# Altium PCB PCB.PcbDoc (part 2 of 2)
Units mil, origin at the board's own origin, x right, y up, seen from the top; angles counter-clockwise.
Board outline 3935 x 3935 mil, 2 copper layers (Top Layer, Bottom Layer); 188 components, 185 nets, 566 pads, 164 vias.
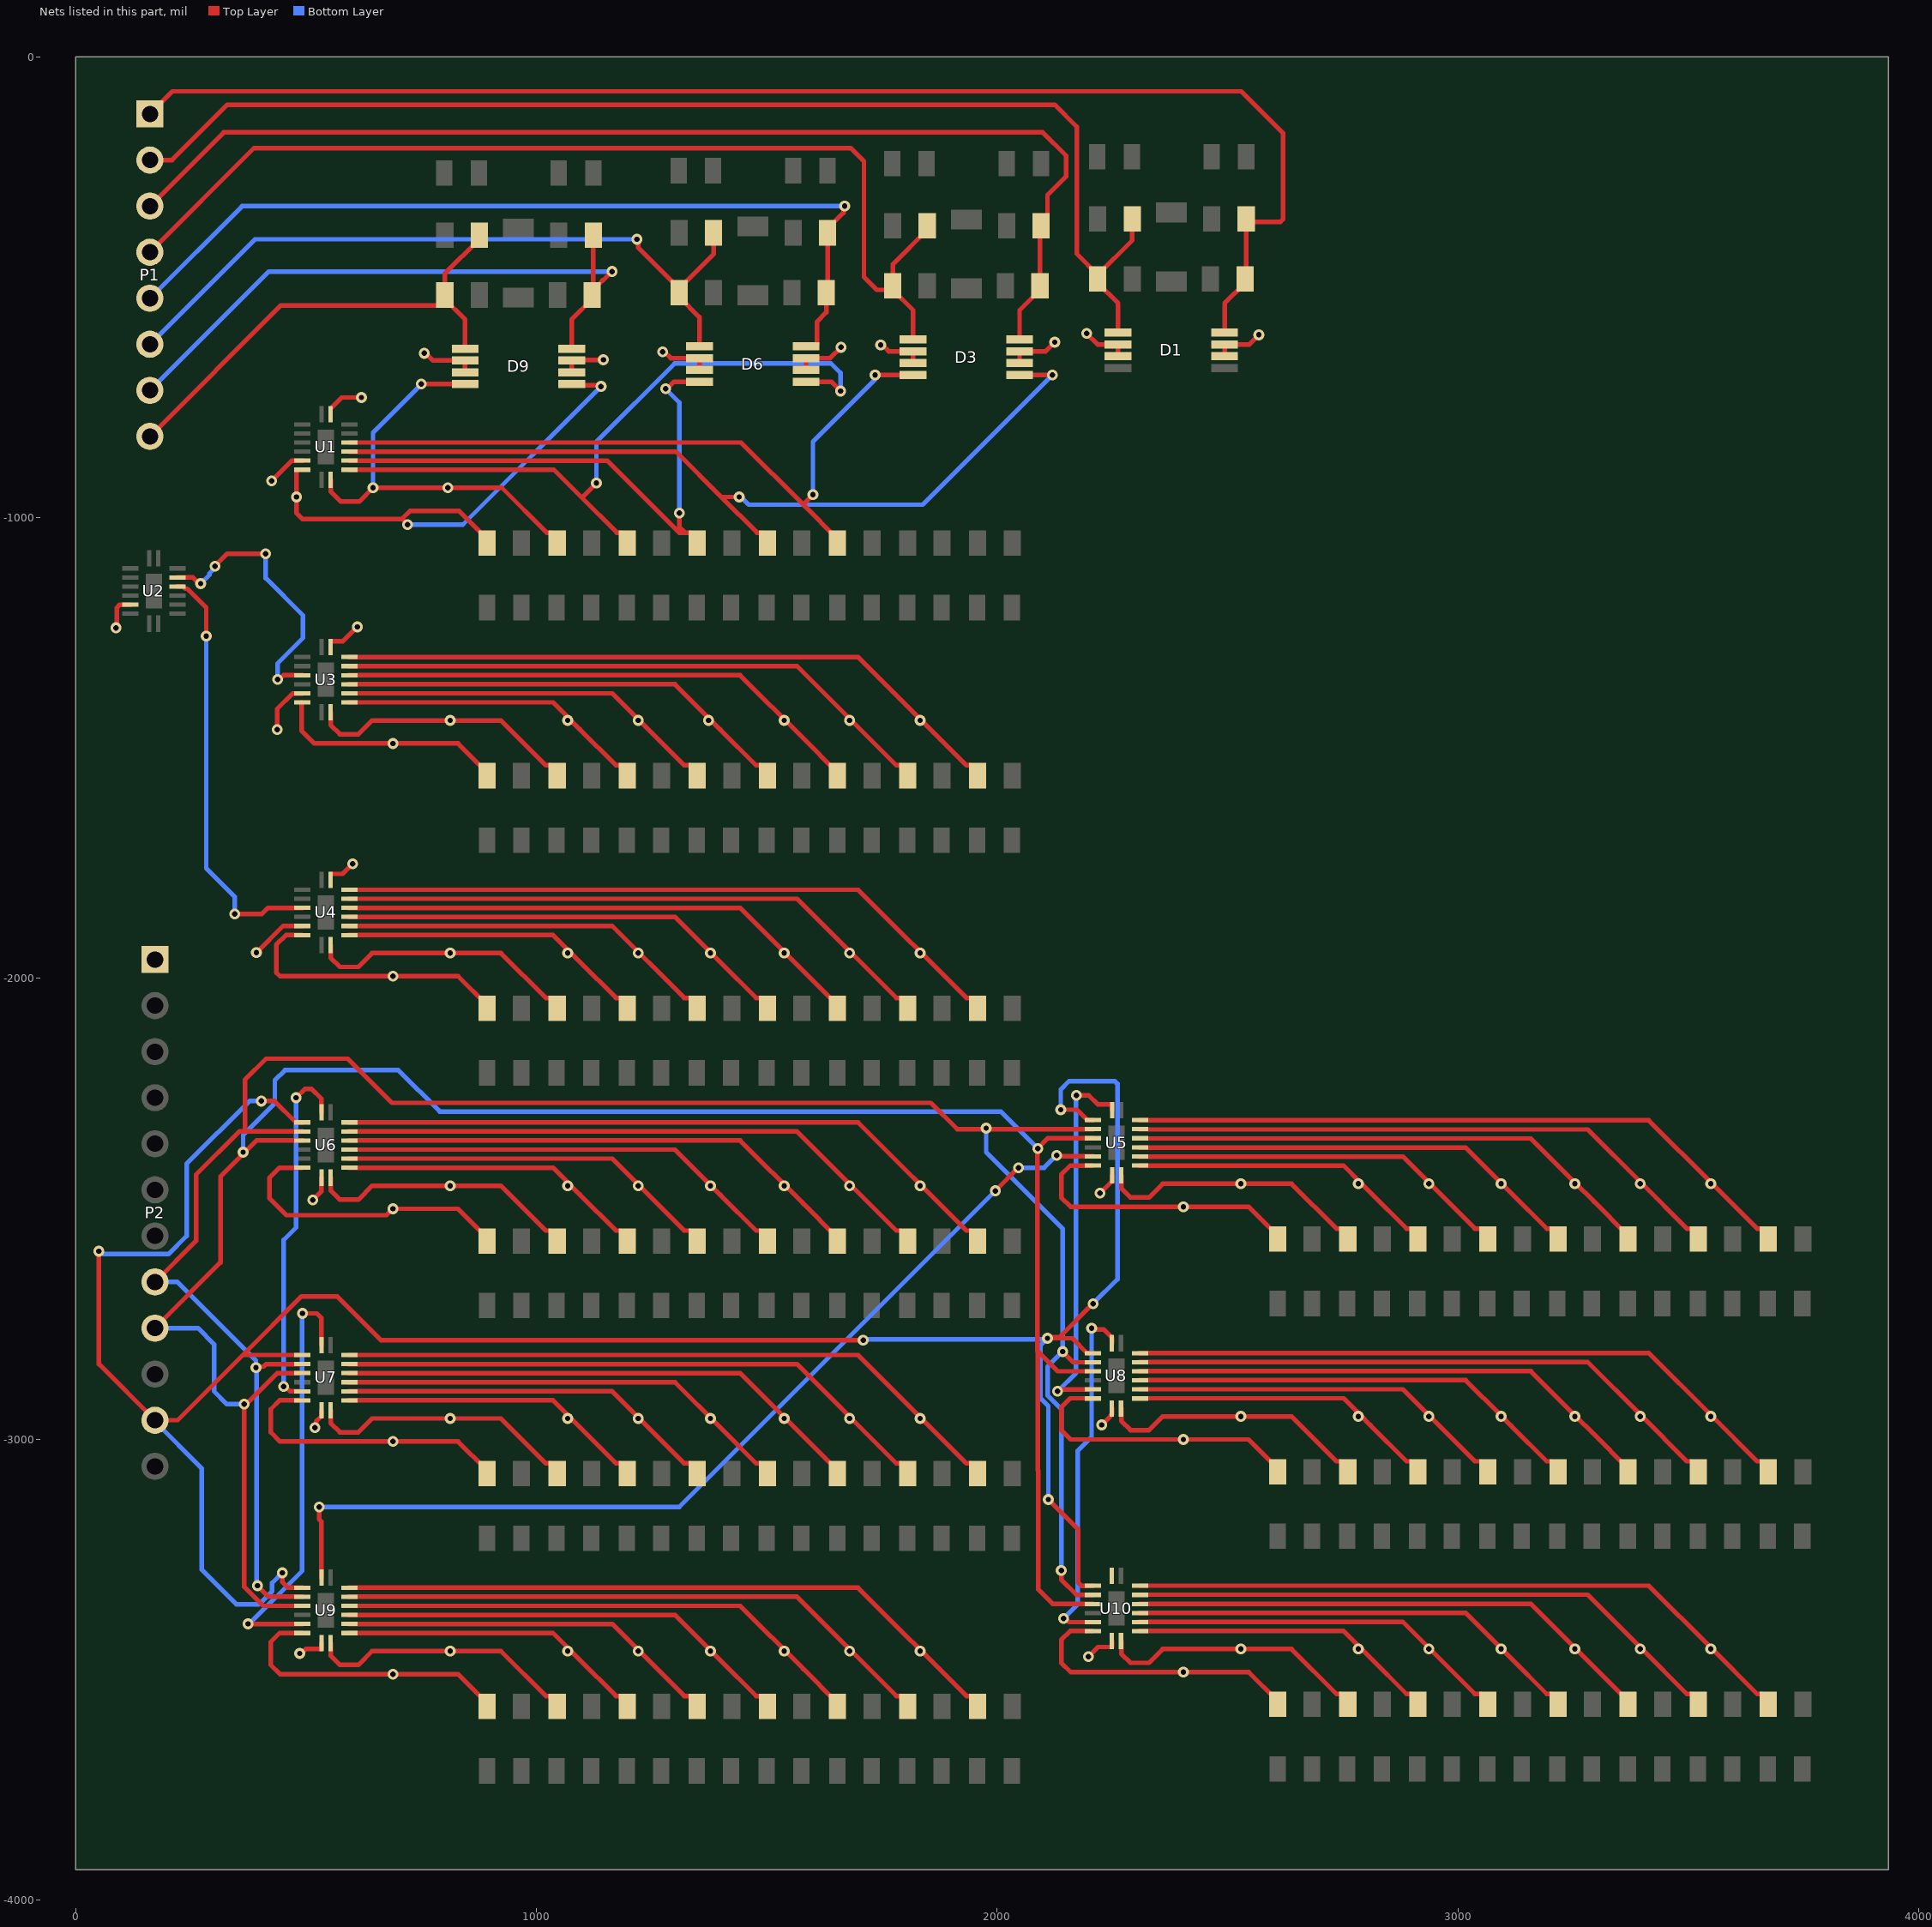
[diagram p2: the nets of this part, all layers, seen from the top]

## Via types
v1: diameter 23.62, hole 11.81, Top Layer to Bottom Layer, 143 vias
v2: diameter 23.62, hole 11.81, Top Layer to Bottom Layer, tented both sides, 21 vias

## Nets (pads, with @x,y where several pads share a name; then routed paths per layer and width w, separated by ;. In a path a pad name is that pad's centre, name@x,y a point inside that pad or via, vN(x,y) a via of type N, cw(c..) or ccw(c..) an arc to the next point about the centre after c; other vN are vias at no path point) (continued)
OUT3: D3.4 R25.2 U1.13 | length 1584.7
  Top Layer w10: U1.13@594.17,-836.77 1443.94,-836.77 1581.09,-973.91 ; v1(1600,-950) 1600,-950.09 1581.09,-969 1581.09,-973.91 ; R25.2@1653.31,-1055 1653.31,-1046.14 1581.09,-973.91 ; v1(1735,-690) D3.4@1817.32,-690
  Bottom Layer w10: v1(1600,-950) 1600,-835 1735,-700 v1(1735,-690)
OUT4: D3.5 R29.2 U1.12 | length 1908.3
  Top Layer w10: U1.12@594.17,-856.46 1302.63,-856.46 1401.17,-955 ; v1(1440,-955) 1401.17,-955 ; R29.2@1501.17,-1055 1501.17,-1046.14 1487.47,-1032.44 1478.61,-1032.44 1401.17,-955 ; D3.5@2048.66,-690 v1(2120,-690)
  Bottom Layer w10: v1(1440,-955) 1443.69,-955 1460.5,-971.81 1838.19,-971.81 v1(2120,-690)
OUT5: D6.4 R33.2 U1.11 | length 1244
  Top Layer w10: U1.11@594.17,-876.14 1153.23,-876.14 1309.53,-1032.44 1322.43,-1032.44 ; v1(1280,-720) 1283.69,-720 1298.69,-705 D6.4@1353.66,-705 ; v1(1310,-990) 1310,-1020.01 1322.43,-1032.44 ; R33.2@1349.03,-1055 1349.03,-1046.14 1335.33,-1032.44 1322.43,-1032.44
  Bottom Layer w10: v1(1280,-720) 1310,-750 v1(1310,-990)
OUT6: D6.5 R37.2 U1.10 | length 1541.4
  Top Layer w10: U1.10@594.17,-895.83 1037.71,-895.83 1095.94,-954.06 ; v1(1130,-925) 1100.94,-954.06 1095.94,-954.06 ; R37.2@1196.88,-1055 1196.88,-1046.14 1183.18,-1032.44 1174.32,-1032.44 1095.94,-954.06 ; D6.5@1585,-705 1640,-705 v1(1660,-725)
  Bottom Layer w10: v1(1130,-925) 1130,-835 1300,-665 1639.14,-665 1660,-685.86 v1(1660,-725)
OUT7: D9.4 R41.2 U1.9 | length 957.3
  Top Layer w10: U1.9@552.83,-917.48 553.11,-917.76 553.11,-943.11 575,-965 615,-965 v1(645,-935) 924.74,-935 1022.18,-1032.44 1031.04,-1032.44 1044.74,-1046.14 R41.2@1044.74,-1055 ; v1(750,-710) D9.4@845,-710
  Bottom Layer w10: v1(645,-935) 645,-815 v1(750,-710)
  other v1: 807.6,-935
OUT8: D9.5 R45.2 U1.7 | length 1181.6
  Top Layer w10: U1.7@479.09,-896.1 479.09,-898.73 479,-898.83 v1(479,-955) 479,-990 491.81,-1002.81 707.81,-1002.81 ; v1(720,-1015) 707.81,-1002.81 ; R45.2@892.6,-1055 892.6,-1046.14 831.46,-985 725.62,-985 707.81,-1002.81 ; D9.5@1076.34,-710 1078.84,-712.5 1137.5,-712.5 v1(1140,-715)
  Bottom Layer w10: v1(720,-1015) 840,-1015 v1(1140,-715)
OUT9: R49.2 U3.15 | length 1475.3
  Top Layer w10: U3.15@592.2,-1302.4 1698.03,-1302.4 1933.07,-1537.44 1941.93,-1537.44 1955.63,-1551.14 R49.2@1955.63,-1560
  other v1: 1832.6,-1440
OUT9-16: U2.14 U3.4 | length 615.1
  Top Layer w10: U2.14@220.35,-1129.59 253.9,-1129.59 267.31,-1143 v2(271,-1143) ; v2(302,-1105) 329,-1078 v2(412,-1078) ; v2(438,-1351) 441.69,-1351 450.91,-1341.77 U3.4@491.81,-1341.77
  Bottom Layer w10: v2(271,-1143) 289.96,-1124.04 289.96,-1120.73 302,-1108.69 v2(302,-1105) ; v2(412,-1078) 412,-1130.99 492.86,-1211.84 492.86,-1261.14 438,-1316 v2(438,-1351)
OUT10: R54.2 U3.14 | length 1323.9
  Top Layer w10: U3.14@592.2,-1322.09 1565.57,-1322.09 1780.93,-1537.44 1789.79,-1537.44 1803.49,-1551.14 1803.49,-1560 R54.2@1803.49,-1568.86
  other v1: 1679.6,-1440
OUT11: R59.2 U3.13 | length 1154.7
  Top Layer w10: U3.13@592.2,-1341.77 1441.97,-1341.77 1579.12,-1478.91 1651.34,-1551.14 R59.2@1651.34,-1560
  other v1: 1537.6,-1440
OUT12: R64.2 U3.12 | length 994.4
  Top Layer w10: U3.12@592.2,-1361.46 1300.66,-1361.46 1399.2,-1460 1476.64,-1537.44 1485.5,-1537.44 1499.2,-1551.14 R64.2@1499.2,-1560
  other v1: 1373.6,-1440
OUT13: R69.2 U3.11 | length 834.1
  Top Layer w10: U3.11@592.2,-1381.14 U3.11@594.17,-1381.14 1164.16,-1381.14 1320.46,-1537.44 1333.36,-1537.44 1347.06,-1551.14 R69.2@1347.06,-1560
  other v1: 1220.6,-1440
OUT14: R74.2 U3.10 | length 673.8
  Top Layer w10: U3.10@592.2,-1400.83 1035.74,-1400.83 1093.97,-1459.06 1172.36,-1537.44 1181.21,-1537.44 1194.92,-1551.14 R74.2@1194.92,-1560
  other v1: 1067.6,-1440
OUT15: R79.2 U3.9 | length 592.9
  Top Layer w10: U3.9@552.83,-1422.48 553.11,-1422.76 553.11,-1450.08 573.03,-1470 613.03,-1470 643.03,-1440 v1(812.6,-1440) 922.77,-1440 1020.21,-1537.44 1029.07,-1537.44 1042.77,-1551.14 R79.2@1042.77,-1560
OUT16: R84.2 U3.7 | length 507.7
  Top Layer w10: U3.7@489.84,-1400.83 489.84,-1462 517.84,-1490 v1(688.03,-1490) 829.49,-1490 890.63,-1551.14 R84.2@890.63,-1560
OUT17: R18.2 U4.15 | length 1475.3
  Top Layer w10: U4.15@592.2,-1807.4 1698.03,-1807.4 1933.07,-2042.44 1941.93,-2042.44 1955.63,-2056.14 R18.2@1955.63,-2065
  other v1: 1832.6,-1945
OUT17-24: U2.13 U4.4 | length 924.5
  Top Layer w10: U2.13@220.35,-1149.27 232.8,-1149.27 237.76,-1154.23 242.21,-1154.23 283,-1195.02 v1(283,-1257) ; v1(345,-1860) 404,-1860 417.23,-1846.77 U4.4@491.81,-1846.77
  Bottom Layer w10: v1(283,-1257) 283,-1761 345,-1823 v1(345,-1860)
OUT18: R22.2 U4.14 | length 1323.9
  Top Layer w10: U4.14@592.2,-1827.09 1565.57,-1827.09 1780.93,-2042.44 1789.79,-2042.44 1803.49,-2056.14 1803.49,-2065 R22.2@1803.49,-2073.86
  other v1: 1679.6,-1945
OUT19: R26.2 U4.13 | length 1154.7
  Top Layer w10: U4.13@592.2,-1846.77 1441.97,-1846.77 1579.12,-1983.91 1651.34,-2056.14 R26.2@1651.34,-2065
  other v1: 1537.6,-1945
OUT20: R30.2 U4.12 | length 994.4
  Top Layer w10: U4.12@592.2,-1866.46 1300.66,-1866.46 1399.2,-1965 1476.64,-2042.44 1485.5,-2042.44 1499.2,-2056.14 R30.2@1499.2,-2065
  other v1: 1377.6,-1945
OUT21: R34.2 U4.11 | length 834.1
  Top Layer w10: U4.11@592.2,-1886.14 U4.11@594.17,-1886.14 1164.16,-1886.14 1320.46,-2042.44 1333.36,-2042.44 1347.06,-2056.14 R34.2@1347.06,-2065
  other v1: 1220.6,-1945
OUT22: R38.2 U4.10 | length 673.8
  Top Layer w10: U4.10@592.2,-1905.83 1035.74,-1905.83 1093.97,-1964.06 1172.36,-2042.44 1181.21,-2042.44 1194.92,-2056.14 R38.2@1194.92,-2065
  other v1: 1067.6,-1945
OUT23: R42.2 U4.9 | length 592.9
  Top Layer w10: U4.9@552.83,-1927.48 553.11,-1927.76 553.11,-1955.08 573.03,-1975 613.03,-1975 643.03,-1945 922.77,-1945 1020.21,-2042.44 1029.07,-2042.44 1042.77,-2056.14 R42.2@1042.77,-2065
  other v1: 812.6,-1945
OUT24: R46.2 U4.7 | length 616.7
  Top Layer w10: U4.7@489.84,-1905.83 456.17,-1905.83 435,-1927 435,-1986.97 443.03,-1995 v1(688.03,-1995) 829.49,-1995 890.63,-2056.14 R46.2@890.63,-2065
OUT25: R50.2 U6.15 | length 648.9
  Top Layer w10: U6.15@489.84,-2410.83 442.2,-2410.83 420,-2433.03 420,-2476.97 457.03,-2514 674.03,-2514 v1(688.03,-2500) 829.49,-2500 890.63,-2561.14 R50.2@890.63,-2570
OUT26: R55.2 U6.1 | length 592.9
  Top Layer w10: U6.1@552.83,-2432.48 553.11,-2432.76 553.11,-2460.08 573.03,-2480 613.03,-2480 643.03,-2450 922.77,-2450 1020.21,-2547.44 1029.07,-2547.44 1042.77,-2561.14 R55.2@1042.77,-2570
  other v1: 812.6,-2450
OUT27: R60.2 U6.2 | length 673.8
  Top Layer w10: U6.2@592.2,-2410.83 1035.74,-2410.83 1093.97,-2469.06 1172.36,-2547.44 1181.21,-2547.44 1194.92,-2561.14 R60.2@1194.92,-2570
  other v1: 1067.6,-2450
OUT28: R65.2 U6.3 | length 834.1
  Top Layer w10: U6.3@592.2,-2391.14 U6.3@594.17,-2391.14 1164.16,-2391.14 1320.46,-2547.44 1333.36,-2547.44 1347.06,-2561.14 R65.2@1347.06,-2570
  other v1: 1220.6,-2450
OUT29: R70.2 U6.4 | length 994.4
  Top Layer w10: U6.4@592.2,-2371.46 1300.66,-2371.46 1399.2,-2470 1476.64,-2547.44 1485.5,-2547.44 1499.2,-2561.14 R70.2@1499.2,-2570
  other v1: 1377.6,-2450
OUT30: R75.2 U6.5 | length 1154.7
  Top Layer w10: U6.5@592.2,-2351.77 1441.97,-2351.77 1579.12,-2488.91 1651.34,-2561.14 R75.2@1651.34,-2570
  other v1: 1537.6,-2450
OUT31: R80.2 U6.6 | length 1323.9
  Top Layer w10: U6.6@592.2,-2332.09 1565.57,-2332.09 1780.93,-2547.44 1789.79,-2547.44 1803.49,-2561.14 1803.49,-2570 R80.2@1803.49,-2578.86
  other v1: 1679.6,-2450
OUT32: R85.2 U6.7 | length 1475.3
  Top Layer w10: U6.7@592.2,-2312.4 1698.03,-2312.4 1933.07,-2547.44 1941.93,-2547.44 1955.63,-2561.14 R85.2@1955.63,-2570
  other v1: 1832.6,-2450
OUT33: R19.2 U7.15 | length 634.8
  Top Layer w10: U7.15@489.84,-2915.83 442.2,-2915.83 423.03,-2935 423.03,-2985 443.03,-3005 v1(688.03,-3005) 829.49,-3005 890.63,-3066.14 R19.2@890.63,-3075
OUT34: R23.2 U7.1 | length 592.9
  Top Layer w10: U7.1@552.83,-2937.48 553.11,-2937.76 553.11,-2965.08 573.03,-2985 613.03,-2985 643.03,-2955 922.77,-2955 1020.21,-3052.44 1029.07,-3052.44 1042.77,-3066.14 R23.2@1042.77,-3075
  other v1: 812.6,-2955
OUT35: R27.2 U7.2 | length 673.8
  Top Layer w10: U7.2@592.2,-2915.83 1035.74,-2915.83 1093.97,-2974.06 1172.36,-3052.44 1181.21,-3052.44 1194.92,-3066.14 R27.2@1194.92,-3075
  other v1: 1067.6,-2955
OUT36: R31.2 U7.3 | length 834.1
  Top Layer w10: U7.3@592.2,-2896.14 U7.3@594.17,-2896.14 1164.16,-2896.14 1320.46,-3052.44 1333.36,-3052.44 1347.06,-3066.14 R31.2@1347.06,-3075
  other v1: 1220.6,-2955
OUT37: R35.2 U7.4 | length 994.4
  Top Layer w10: U7.4@592.2,-2876.46 1300.66,-2876.46 1399.2,-2975 1476.64,-3052.44 1485.5,-3052.44 1499.2,-3066.14 R35.2@1499.2,-3075
  other v1: 1377.6,-2955
OUT38: R39.2 U7.5 | length 1154.7
  Top Layer w10: U7.5@592.2,-2856.77 1441.97,-2856.77 1579.12,-2993.91 1651.34,-3066.14 R39.2@1651.34,-3075
  other v1: 1537.6,-2955
OUT39: R43.2 U7.6 | length 1323.9
  Top Layer w10: U7.6@592.2,-2837.09 1565.57,-2837.09 1780.93,-3052.44 1789.79,-3052.44 1803.49,-3066.14 1803.49,-3075 R43.2@1803.49,-3083.86
  other v1: 1679.6,-2955
OUT40: R47.2 U7.7 | length 1475.3
  Top Layer w10: U7.7@592.2,-2817.4 1698.03,-2817.4 1933.07,-3052.44 1941.93,-3052.44 1955.63,-3066.14 R47.2@1955.63,-3075
  other v1: 1832.6,-2955
OUT41: R51.2 U9.15 | length 634.8
  Top Layer w10: U9.15@489.84,-3420.83 442.2,-3420.83 423.03,-3440 423.03,-3490 443.03,-3510 v1(688.03,-3510) 829.49,-3510 890.63,-3571.14 R51.2@890.63,-3580
OUT42: R56.2 U9.1 | length 592.9
  Top Layer w10: U9.1@552.83,-3442.48 553.11,-3442.76 553.11,-3470.08 573.03,-3490 613.03,-3490 643.03,-3460 922.77,-3460 1020.21,-3557.44 1029.07,-3557.44 1042.77,-3571.14 R56.2@1042.77,-3580
  other v1: 812.6,-3460
OUT43: R61.2 U9.2 | length 673.8
  Top Layer w10: U9.2@592.2,-3420.83 1035.74,-3420.83 1093.97,-3479.06 1172.36,-3557.44 1181.21,-3557.44 1194.92,-3571.14 R61.2@1194.92,-3580
  other v1: 1067.6,-3460
OUT44: R66.2 U9.3 | length 834.1
  Top Layer w10: U9.3@592.2,-3401.14 U9.3@594.17,-3401.14 1164.16,-3401.14 1320.46,-3557.44 1333.36,-3557.44 1347.06,-3571.14 R66.2@1347.06,-3580
  other v1: 1220.6,-3460
OUT45: R71.2 U9.4 | length 994.4
  Top Layer w10: U9.4@592.2,-3381.46 1300.66,-3381.46 1399.2,-3480 1476.64,-3557.44 1485.5,-3557.44 1499.2,-3571.14 R71.2@1499.2,-3580
  other v1: 1377.6,-3460
OUT46: R76.2 U9.5 | length 1154.7
  Top Layer w10: U9.5@592.2,-3361.77 1441.97,-3361.77 1579.12,-3498.91 1651.34,-3571.14 R76.2@1651.34,-3580
  other v1: 1537.6,-3460
OUT47: R81.2 U9.6 | length 1323.9
  Top Layer w10: U9.6@592.2,-3342.09 1565.57,-3342.09 1780.93,-3557.44 1789.79,-3557.44 1803.49,-3571.14 1803.49,-3580 R81.2@1803.49,-3588.86
  other v1: 1679.6,-3460
OUT48: R86.2 U9.7 | length 1475.3
  Top Layer w10: U9.7@592.2,-3322.4 1698.03,-3322.4 1933.07,-3557.44 1941.93,-3557.44 1955.63,-3571.14 R86.2@1955.63,-3580
  other v1: 1832.6,-3460
OUT49: R20.2 U5.15 | length 634.8
  Top Layer w10: U5.15@2206.02,-2406.4 2158.39,-2406.4 2139.21,-2425.57 2139.21,-2475.57 2159.21,-2495.57 v1(2404.21,-2495.57) 2545.67,-2495.57 2606.81,-2556.71 R20.2@2606.81,-2565.57
OUT50: R24.2 U5.1 | length 592.9
  Top Layer w10: U5.1@2269.02,-2428.05 2269.29,-2428.33 2269.29,-2455.65 2289.21,-2475.57 2329.21,-2475.57 2359.21,-2445.57 v1(2528.78,-2445.57) 2638.95,-2445.57 2736.39,-2543.01 2745.25,-2543.01 2758.95,-2556.71 R24.2@2758.95,-2565.57
OUT51: R28.2 U5.2 | length 673.8
  Top Layer w10: U5.2@2308.39,-2406.4 2751.92,-2406.4 2787.44,-2441.91 2810.15,-2464.63 2888.54,-2543.01 2897.4,-2543.01 2911.1,-2556.71 R28.2@2911.1,-2565.57
  other v1: 2783.78,-2445.57
OUT52: R32.2 U5.3 | length 834.1
  Top Layer w10: U5.3@2308.39,-2386.71 2310.35,-2386.71 2880.34,-2386.71 2937.99,-2444.36 3036.64,-2543.01 3049.54,-2543.01 3063.24,-2556.71 R32.2@3063.24,-2565.57
  other v1: 2936.78,-2445.57
OUT53: R36.2 U5.4 | length 994.4
  Top Layer w10: U5.4@2308.39,-2367.03 3016.84,-2367.03 3094.58,-2444.77 3115.38,-2465.57 3192.82,-2543.01 3201.68,-2543.01 3215.38,-2556.71 R36.2@3215.38,-2565.57
  other v1: 3093.78,-2445.57
OUT54: R40.2 U5.5 | length 1154.7
  Top Layer w10: U5.5@2308.39,-2347.34 3158.15,-2347.34 3255.08,-2444.27 3295.3,-2484.49 3367.52,-2556.71 R40.2@3367.52,-2565.57
  other v1: 3253.78,-2445.57
OUT55: R44.2 U5.6 | length 1323.9
  Top Layer w10: U5.6@2308.39,-2327.66 3281.75,-2327.66 3397.72,-2443.63 3497.11,-2543.01 3505.97,-2543.01 3519.67,-2556.71 3519.67,-2565.57 R44.2@3519.67,-2574.43
  other v1: 3395.78,-2445.57
OUT56: R48.2 U5.7 | length 1475.3
  Top Layer w10: U5.7@2308.39,-2307.97 3414.21,-2307.97 3550.29,-2444.06 3649.25,-2543.01 3658.11,-2543.01 3671.81,-2556.71 R48.2@3671.81,-2565.57
  other v1: 3548.78,-2445.57
OUT57: R52.2 U8.15 | length 634.8
  Top Layer w10: U8.15@2206.02,-2911.4 2158.39,-2911.4 2139.21,-2930.57 2139.21,-2980.57 2159.21,-3000.57 v1(2404.21,-3000.57) 2545.67,-3000.57 2606.81,-3061.71 R52.2@2606.81,-3070.57
OUT58: R57.2 U8.1 | length 592.9
  Top Layer w10: U8.1@2269.02,-2933.05 2269.29,-2933.33 2269.29,-2960.65 2289.21,-2980.57 2329.21,-2980.57 2359.21,-2950.57 v1(2528.78,-2950.57) 2638.95,-2950.57 2736.39,-3048.01 2745.25,-3048.01 2758.95,-3061.71 R57.2@2758.95,-3070.57
OUT59: R62.2 U8.2 | length 673.8
  Top Layer w10: U8.2@2308.39,-2911.4 2751.92,-2911.4 2787.44,-2946.91 2810.15,-2969.63 2888.54,-3048.01 2897.4,-3048.01 2911.1,-3061.71 R62.2@2911.1,-3070.57
  other v1: 2783.78,-2950.57
OUT60: R67.2 U8.3 | length 834.1
  Top Layer w10: U8.3@2308.39,-2891.71 2310.35,-2891.71 2880.34,-2891.71 2937.99,-2949.36 3036.64,-3048.01 3049.54,-3048.01 3063.24,-3061.71 R67.2@3063.24,-3070.57
  other v1: 2936.78,-2950.57
OUT61: R72.2 U8.4 | length 994.4
  Top Layer w10: U8.4@2308.39,-2872.03 3016.84,-2872.03 3094.58,-2949.77 3115.38,-2970.57 3192.82,-3048.01 3201.68,-3048.01 3215.38,-3061.71 R72.2@3215.38,-3070.57
  other v1: 3093.78,-2950.57
OUT62: R77.2 U8.5 | length 1154.7
  Top Layer w10: U8.5@2308.39,-2852.34 3158.15,-2852.34 3255.08,-2949.27 3295.3,-2989.49 3367.52,-3061.71 R77.2@3367.52,-3070.57
  other v1: 3253.78,-2950.57
OUT63: R82.2 U8.6 | length 1323.9
  Top Layer w10: U8.6@2308.39,-2832.66 3281.75,-2832.66 3397.72,-2948.63 3497.11,-3048.01 3505.97,-3048.01 3519.67,-3061.71 3519.67,-3070.57 R82.2@3519.67,-3079.43
  other v1: 3395.78,-2950.57
OUT64: R87.2 U8.7 | length 1475.3
  Top Layer w10: U8.7@2308.39,-2812.97 3414.21,-2812.97 3550.29,-2949.06 3649.25,-3048.01 3658.11,-3048.01 3671.81,-3061.71 R87.2@3671.81,-3070.57
  other v1: 3548.78,-2950.57
OUT65: R53.2 U10.15 | length 634.8
  Top Layer w10: U10.15@2206.02,-3416.4 2158.39,-3416.4 2139.21,-3435.57 2139.21,-3485.57 2159.21,-3505.57 v1(2404.21,-3505.57) 2545.67,-3505.57 2606.81,-3566.71 R53.2@2606.81,-3575.57
OUT66: R58.2 U10.1 | length 592.9
  Top Layer w10: U10.1@2269.02,-3438.05 2269.29,-3438.33 2269.29,-3465.65 2289.21,-3485.57 2329.21,-3485.57 2359.21,-3455.57 v1(2528.78,-3455.57) 2638.95,-3455.57 2736.39,-3553.01 2745.25,-3553.01 2758.95,-3566.71 R58.2@2758.95,-3575.57
OUT67: R63.2 U10.2 | length 673.8
  Top Layer w10: U10.2@2308.39,-3416.4 2751.92,-3416.4 2787.44,-3451.91 2810.15,-3474.63 2888.54,-3553.01 2897.4,-3553.01 2911.1,-3566.71 R63.2@2911.1,-3575.57
  other v1: 2783.78,-3455.57
OUT68: R68.2 U10.3 | length 834.1
  Top Layer w10: U10.3@2308.39,-3396.71 2310.35,-3396.71 2880.34,-3396.71 2937.99,-3454.36 3036.64,-3553.01 3049.54,-3553.01 3063.24,-3566.71 R68.2@3063.24,-3575.57
  other v1: 2936.78,-3455.57
OUT69: R73.2 U10.4 | length 994.4
  Top Layer w10: U10.4@2308.39,-3377.03 3016.84,-3377.03 3094.58,-3454.77 3115.38,-3475.57 3192.82,-3553.01 3201.68,-3553.01 3215.38,-3566.71 R73.2@3215.38,-3575.57
  other v1: 3093.78,-3455.57
OUT70: R78.2 U10.5 | length 1154.7
  Top Layer w10: U10.5@2308.39,-3357.34 3158.15,-3357.34 3255.08,-3454.27 3295.3,-3494.49 3367.52,-3566.71 R78.2@3367.52,-3575.57
  other v1: 3253.78,-3455.57
OUT71: R83.2 U10.6 | length 1323.9
  Top Layer w10: U10.6@2308.39,-3337.66 3281.75,-3337.66 3397.72,-3453.63 3497.11,-3553.01 3505.97,-3553.01 3519.67,-3566.71 3519.67,-3575.57 R83.2@3519.67,-3584.43
  other v1: 3395.78,-3455.57
OUT72: R88.2 U10.7 | length 1475.3
  Top Layer w10: U10.7@2308.39,-3317.97 3414.21,-3317.97 3550.29,-3454.06 3649.25,-3553.01 3658.11,-3553.01 3671.81,-3566.71 R88.2@3671.81,-3575.57
  other v1: 3548.78,-3455.57
Q7S1: U6.9 U7.14 | length 784.5
  Top Layer w10: v1(451,-2886) 454.69,-2886 464.55,-2895.87 491.54,-2895.87 U7.14@491.81,-2896.14 ; v1(478,-2259) 497,-2240 511.91,-2240 533.15,-2261.24 U6.9@533.15,-2290.75
  Bottom Layer w10: v1(451,-2886) 451,-2567.66 478,-2540.66 v1(478,-2259)
Q7S2: U7.9 U9.14 | length 946.8
  Top Layer w10: v1(373.61,-3401) 491.67,-3401 U9.14@491.81,-3401.14 ; v1(492,-2727) 523,-2727 533.15,-2737.15 U7.9@533.15,-2795.75
  Bottom Layer w10: v1(373.61,-3401) 376.21,-3401 491,-3286.21 491,-2728 v1(492,-2727)
Q7S3: U5.14 U9.9 | length 2152.8
  Top Layer w10: v1(528,-3147) 528,-3173.81 533.15,-3178.96 U9.9@533.15,-3300.75 ; v1(1996,-2461) v1(2046,-2411) ; v1(2129,-2384) 2130.87,-2385.87 2207.72,-2385.87 U5.14@2207.99,-2386.14
  Bottom Layer w10: v1(528,-3147) 1310,-3147 v1(1996,-2461) ; v1(2046,-2411) 2102,-2411 v1(2129,-2384)
Q7S4: U5.9 U8.14 | length 835
  Top Layer w10: v1(2131,-2896) 2134.69,-2896 2138.59,-2892.1 U8.14@2207.6,-2892.1 ; v1(2172,-2254) 2198.81,-2254 2217.84,-2273.03 2249.06,-2273.03 2249.33,-2273.31 U5.9@2249.33,-2285.75
  Bottom Layer w10: v1(2131,-2896) 2171,-2856 2171,-2255 v1(2172,-2254)
Q7S5: U8.9 U10.14 | length 787
  Top Layer w10: v1(2144,-3389) 2147.69,-3389 2155.78,-3397.1 U10.14@2207.6,-3397.1 ; v1(2205,-2759) 2207.61,-2761.61 2231.28,-2761.61 2248.94,-2779.26 U8.9@2248.94,-2791.71
  Bottom Layer w10: v1(2144,-3389) 2175,-3358 2175,-3025 2205,-2995 v1(2205,-2759)
Q7S6: U10.9
RESET: P2.11 U5.10 U6.10 U7.10 U8.10 U9.10 U10.10 | length 5609.1
  Top Layer w10: v1(50,-2592) 50,-2837.12 P2.11@171.78,-2958.9 221.1,-2958.9 362.6,-2817.4 ; v1(402.69,-2266.16) 431.16,-2266.16 477.4,-2312.4 U6.10@491.81,-2312.4 ; v1(448,-3290) 448,-3310 460.4,-3322.4 U9.10@491.81,-3322.4 ; U7.10@491.81,-2817.4 362.6,-2817.4 ; v2(1709,-2785) 662,-2785 567,-2690 490,-2690 362.6,-2817.4 ; v2(2111,-3131) 2176,-3196 2176,-3311.86 2182.5,-3318.36 U10.10@2207.6,-3318.36 ; v2(2138,-2285) 2173.15,-2285 2195.55,-2307.4 U5.10@2207.99,-2307.4 ; U8.10@2207.6,-2813.36 2195.16,-2813.36 2162.8,-2781 v2(2109,-2781) 2111.61,-2778.39 2135.61,-2778.39 v2(2208,-2706)
  Bottom Layer w10: v1(50,-2592) 53.69,-2592 60.11,-2598.42 201,-2598.42 240.42,-2559 240.42,-2402.62 376.89,-2266.16 v1(402.69,-2266.16) ; P2.11@171.78,-2958.9 171.78,-2961.78 273,-3063 273,-3283 348.86,-3358.86 397.14,-3358.86 426,-3330 426,-3312 v1(448,-3290) ; v2(1709,-2785) 1711,-2783 v2@2107,-2783 ; v2(2109,-2781) v2@2107,-2783 ; v2(2111,-3131) 2111,-2928.06 2094.19,-2911.25 2094.19,-2795.81 v2@2107,-2783 ; v2(2138,-2285) 2138,-2241 2156,-2223 2255.14,-2223 2261,-2228.86 2261,-2653 v2(2208,-2706)
SHCP: P2.8 U5.11 U6.11 U7.11 U8.11 U9.11 U10.11 | length 4800
  Top Layer w10: P2.8@171.78,-2658.9 261,-2569.68 261,-2425.91 354.82,-2332.09 367,-2332.09 ; v1(391,-2845) 393.61,-2842.39 407.61,-2842.39 412.91,-2837.09 U7.11@491.81,-2837.09 ; v1(394,-3318) 418.09,-3342.09 U9.11@491.81,-3342.09 ; U6.11@491.81,-2332.09 367,-2332.09 ; v1(2139,-3285) 2139,-3305 2172.04,-3338.04 U10.11@2207.6,-3338.04 ; v1(2142,-2810) 2165.04,-2833.04 U8.11@2207.6,-2833.04 ; U5.11@2207.99,-2327.09 1913.09,-2327.09 1856,-2270 686,-2270 590.14,-2174.14 412.86,-2174.14 367,-2220 367,-2332.09
  Bottom Layer w10: P2.8@171.78,-2658.9 220.61,-2658.9 391,-2829.29 v1(391,-2845) 392.5,-2846.5 392.5,-3313.5 391,-3315 v1(394,-3318) ; v1(1976,-2325) 1976,-2377 2142,-2543 v1(2142,-2810) 2109.19,-2842.81 2109.19,-2905.03 2139,-2934.85 v1(2139,-3285)
STCP: P2.9 U5.12 U6.12 U7.12 U8.12 U9.12 U10.12 | length 4890.9
  Top Layer w10: P2.9@171.78,-2758.9 314,-2616.68 314,-2430 392.23,-2351.77 U6.12@491.81,-2351.77 ; U9.12@491.81,-3361.77 406.93,-3361.77 365.17,-3320.01 v1(365.17,-2924) 369.89,-2924 437.12,-2856.77 U7.12@491.81,-2856.77 ; U10.12@2207.6,-3357.73 2120.73,-3357.73 2088.81,-3325.81 2088.81,-3067.81 2088,-3067 2088,-2809 ; U8.12@2207.6,-2852.73 2131.73,-2852.73 2088,-2809 ; U5.12@2207.99,-2346.77 2110.23,-2346.77 2087.19,-2369.81 2087.19,-2808.19 2088,-2809
  Bottom Layer w10: P2.9@171.78,-2758.9 264.9,-2758.9 300,-2794 300,-2896 328,-2924 v1(365.17,-2924) ; v1(363,-2377) 363,-2340 432,-2271 432,-2220.86 453.86,-2199 700,-2199 790,-2289 2008,-2289 v1(2088,-2369)
TP1: D1.8 P1.1 R1.1 R3.2 | length 3055.4
  Top Layer w10: P1.1@160.78,-123.57 209.78,-74.57 2529.78,-74.57 2620.78,-165.57 2620.78,-351.71 2614.92,-357.57 2546.35,-357.57 R3.2@2540.39,-351.61 2540.39,-479.02 R1.1@2537.8,-481.61 2537.8,-490.47 2493.66,-534.61 D1.8@2493.66,-598.23
TP2: D1.1 P1.2 R2.1 R5.2 | length 2717.5
  Top Layer w10: P1.2@160.78,-223.57 208.78,-223.57 328.78,-103.57 2124.78,-103.57 2172.78,-151.57 2172.78,-427.35 R2.1@2218.19,-472.76 ; D1.1@2262.32,-598.23 2262.32,-534.61 2218.19,-490.47 R2.1@2218.19,-481.61 R2.1@2218.19,-472.76 ; R5.2@2292.99,-351.61 2292.99,-397.95 R2.1@2218.19,-472.76
TP3: D3.8 P1.3 R4.1 R7.2 | length 2516.9
  Top Layer w10: P1.3@160.78,-323.57 320.78,-163.57 2098.78,-163.57 2149.78,-214.57 2149.78,-258.97 2109.09,-299.66 2109.09,-352.91 R7.2@2095.39,-366.61 2092.8,-369.21 R4.1@2092.8,-496.61 2092.8,-505.47 2048.66,-549.61 D3.8@2048.66,-613.23
TP4: D3.1 P1.4 R6.1 R9.2 | length 2276.5
  Top Layer w10: P1.4@160.78,-423.57 386.78,-197.57 1681.78,-197.57 1710.78,-226.57 1710.78,-477.57 1738.68,-505.47 R6.1@1773.19,-505.47 ; D3.1@1817.32,-613.23 1817.32,-549.61 R6.1@1773.19,-505.47 ; R9.2@1847.99,-366.61 1847.99,-375.47 1773.19,-450.28 R6.1@1773.19,-496.61 R6.1@1773.19,-505.47
TP5: D6.8 P1.5 R8.1 R11.2 | length 1942
  Top Layer w10: D6.8@1585,-628.23 1605.18,-628.23 1609.04,-624.37 1609.04,-574.27 1629.13,-554.17 R8.1@1629.13,-511.61 1631.73,-509.02 R11.2@1631.73,-381.61 1631.73,-372.76 1666.17,-338.32 1666.17,-326.18 v1(1668.78,-323.57)
  Bottom Layer w10: P1.5@160.78,-523.57 360.78,-323.57 v1(1668.78,-323.57)
TP6: D6.1 P1.6 R10.1 R13.2 | length 1592.5
  Top Layer w10: v1(1217.78,-395.57) 1220.39,-398.18 1220.39,-413.61 R10.1@1309.53,-502.76 ; D6.1@1353.66,-628.23 1353.66,-564.61 1309.53,-520.47 R10.1@1309.53,-511.61 R10.1@1309.53,-502.76 ; R13.2@1384.33,-381.61 1384.33,-427.95 R10.1@1309.53,-502.76
  Bottom Layer w10: P1.6@160.78,-623.57 388.78,-395.57 v1(1217.78,-395.57)
TP7: D9.8 P1.7 R12.1 R15.2 | length 1432.9
  Top Layer w10: D9.8@1076.34,-633.23 1076.34,-569.61 1120.47,-525.47 R12.1@1120.47,-516.61 1120.47,-507.76 R12.1@1123.07,-505.16 ; R15.2@1123.07,-386.61 R12.1@1123.07,-505.16 ; v1(1163.78,-465.57) 1144.82,-484.53 1143.7,-484.53 R12.1@1123.07,-505.16
  Bottom Layer w10: P1.7@160.78,-723.57 418.78,-465.57 v1(1163.78,-465.57)
TP8: D9.1 P1.8 R14.1 R16.2 | length 1059.4
  Top Layer w10: P1.8@160.78,-823.57 445.18,-539.17 787.16,-539.17 R14.1@800.87,-525.47 ; D9.1@845,-633.23 845,-569.61 R14.1@800.87,-525.47 ; R16.2@875.67,-386.61 875.67,-395.47 800.87,-470.28 R14.1@800.87,-516.61 R14.1@800.87,-525.47
VCC: D1.2 D1.3 D1.6 D1.7 D3.2 D3.3 D3.6 D3.7 D6.2 D6.3 D6.6 D6.7 D9.2 D9.3 D9.6 D9.7 P2.1 U1.6 U1.16 U2.6 U3.6 U3.16 U4.6 U4.16 U5.16 U6.16 U7.16 U8.16 U9.16 U10.16 | length 1834.7
  Top Layer w10: v2(87,-1239) 89.11,-1236.89 89.11,-1195.11 95.3,-1188.92 117.72,-1188.92 U2.6@117.99,-1188.64 ; v1(392,-1944) 449.86,-1886.14 U4.6@491.81,-1886.14 ; v1(425,-920) 468.58,-876.42 491.54,-876.42 U1.6@491.81,-876.14 ; v1(437,-1460) 437,-1415 470.58,-1381.42 491.54,-1381.42 U3.6@491.81,-1381.14 ; v1(486,-3465) 489.69,-3465 499.49,-3455.2 532.87,-3455.2 533.15,-3454.92 U9.16@533.15,-3442.48 ; v1(514,-2481) 532.96,-2462.04 532.96,-2432.67 U6.16@533.15,-2432.48 ; v1(519,-2975) 521.61,-2972.39 521.61,-2961.46 533.15,-2949.92 U7.16@533.15,-2937.48 ; U4.16@552.83,-1785.75 552.83,-1773.31 553.11,-1773.03 578.97,-1773.03 v1(601,-1751) ; U3.16@552.83,-1280.75 552.83,-1268.31 553.11,-1268.03 579.97,-1268.03 v1(611,-1237) ; U1.16@552.83,-775.75 552.83,-763.31 577.14,-739 v1(620,-739) ; v1(756,-643) 759.69,-643 775.51,-658.82 D9.2@845,-658.82 D9.3@845,-684.41 ; D9.6@1076.34,-684.41 D9.7@1076.34,-658.82 1077.25,-657.91 1144.09,-657.91 v1(1145,-657) ; v1(1274,-640) 1277.69,-640 1291.51,-653.82 D6.2@1353.66,-653.82 D6.3@1353.66,-679.41 ; D6.6@1585,-679.41 D6.7@1585,-653.82 1637.18,-653.82 v1(1661,-630) ; v1(1747,-625) 1750.69,-625 1764.5,-638.82 D3.2@1817.32,-638.82 D3.3@1817.32,-664.41 ; D3.6@2048.66,-664.41 D3.7@2048.66,-638.82 2105.18,-638.82 v1(2125,-619) ; v1(2194,-600) 2217.82,-623.82 D1.2@2262.32,-623.82 D1.3@2262.32,-649.41 ; v1(2198,-3472) 2218.85,-3451.15 2248.66,-3451.15 2248.94,-3450.88 U10.16@2248.94,-3438.44 ; v1(2223,-2466) 2223.25,-2466 2249.33,-2439.92 U5.16@2249.33,-2427.48 ; v1(2227,-2969) 2245.96,-2950.04 2245.96,-2948.86 2248.94,-2945.88 U8.16@2248.94,-2933.44 ; D1.6@2493.66,-649.41 D1.7@2493.66,-623.82 2547.18,-623.82 v1(2568,-603)
pads on no net: U2.7 U2.9 U2.10 U2.11 U2.12 U2.16

## Polygon pours and split planes (outlines as drawn)
VCC on Bottom Layer "Bottom Layer-VCC" (solid, pour order 4): 0,0 3937.01,0 3937.01,-3937.01 0,-3937.01
GND on Top Layer (solid, pour order 6): 0,0 3935,0 3935,-3935 0,-3935

## Silkscreen, mask and mechanical layers (free items; w line width, h text height)
Top Overlay:
  text "TP1" at 230,-145 h60
  text "TP8" at 221,-845 h60
  text "VCC" at 246,-1973.78 h60
  text "A" at 246,-2073 h60
  text "B" at 246,-2165 h60
  text "C" at 246,-2267 h60
  text "D" at 246,-2369 h60
  text "E" at 246,-2470 h60
  text "EN" at 246,-2575 h60
  text "SHCP" at 246,-2665 h60
  text "STCP" at 246,-2778 h60
  text "DS" at 246,-2874 h60
  text "RESET" at 246,-2973 h60
  text "GND" at 246,-3084 h60
Board Outline:
  the board outline again, w5